# EAGLE board protector4 (EAGLE 8.3.1)
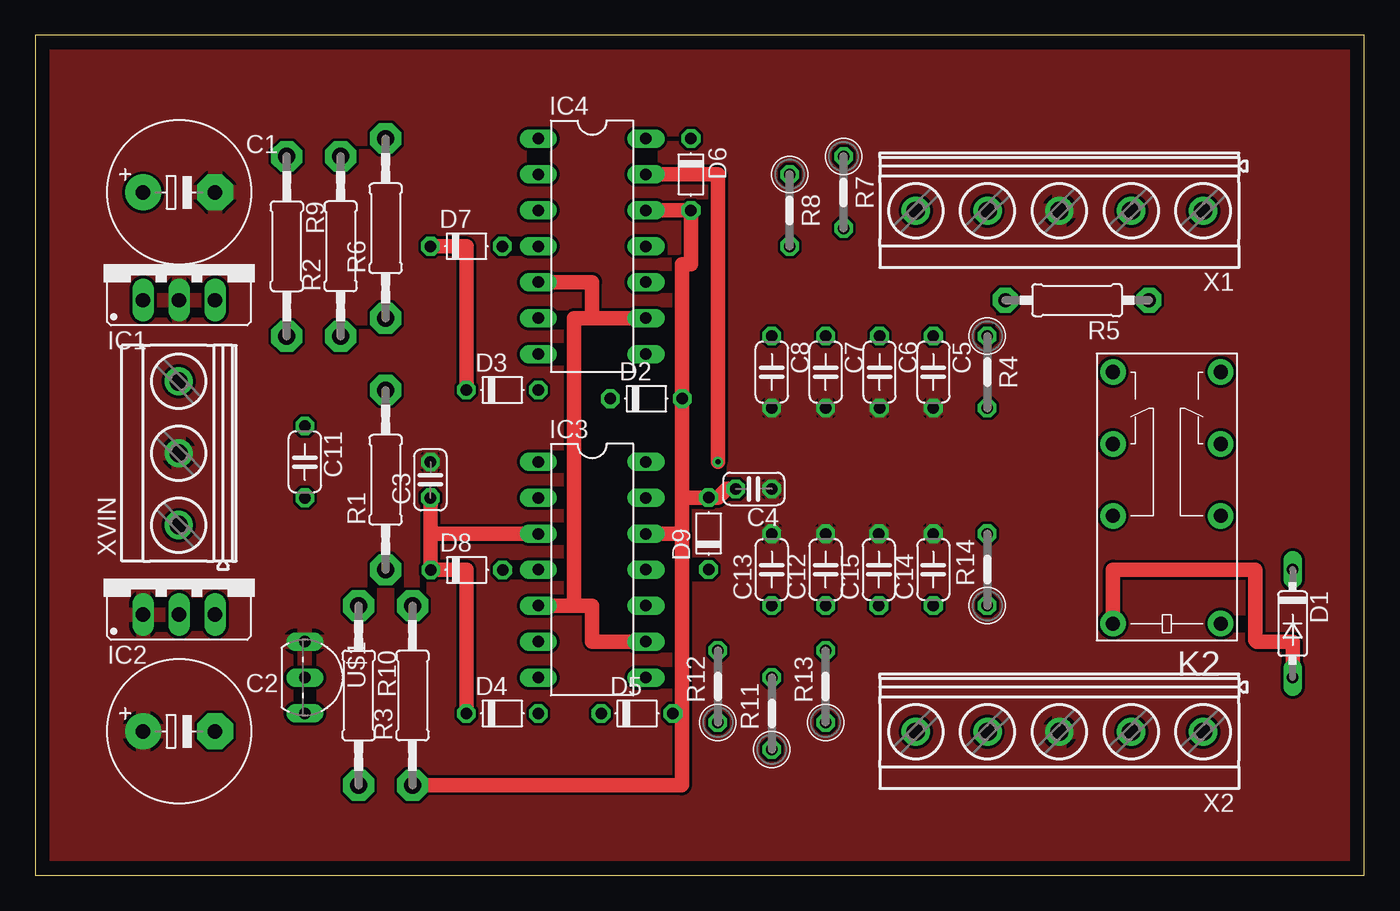
[diagram p0: board, top side]
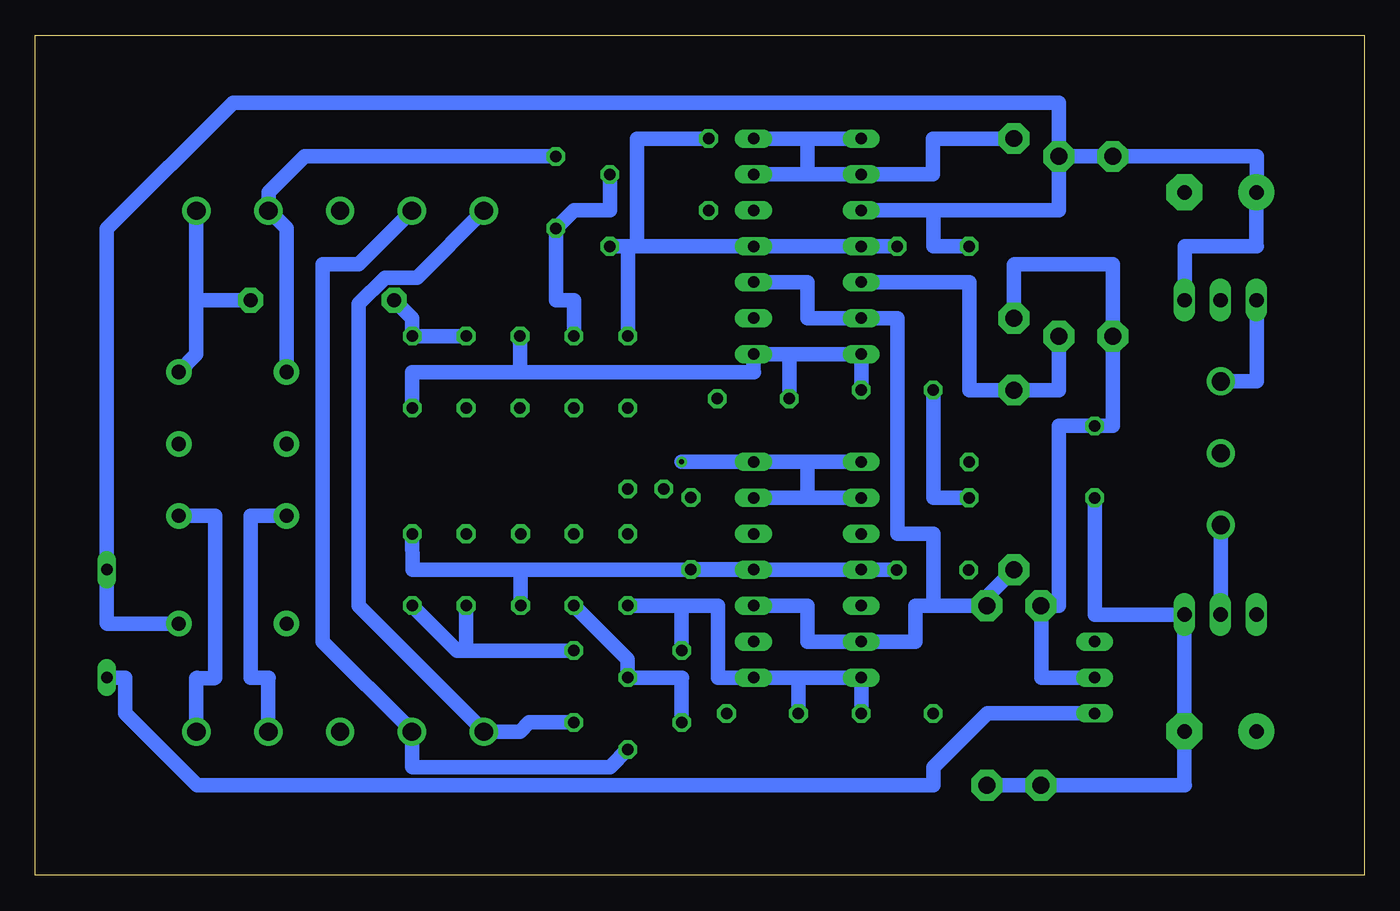
[diagram p1: board, bottom side, seen from below]

Size 93.96 x 59.36 mm. Coordinates in mm from the lower left corner, seen from the top.
Outline: 0,0 93.96,0 93.96,59.36 0,59.36 0,0
Copper layers (1*16): Top 0.035mm / dielectric 1.5mm / Bottom 0.035mm
Design rules "default": minimum track width 10mil, minimum drill 24mil, track to track 8mil, track to pad 8mil, pad to pad 8mil, via to via 8mil, smd to smd 8mil, copper to edge 40mil, drill to drill 8mil, minimum pad ring 10mil, minimum via ring 8mil, stop-mask expansion 4mil, vias tented up to drill 0mil, thermal gap 10mil

## Footprints (pad centres in the part's own frame; a part is rotated, then mirrored left to right if it is on the bottom)
E5-10,5 = drill 1.016 pad 2.54: + -2.54,0 | drill 1.016 pad 2.54 octagon: - 2.54,0
C025-024X044 = drill 0.813 octagon: 1 -1.27,0; 2 1.27,0
C050-024X044 = drill 0.813 octagon: 1 -2.54,0; 2 2.54,0
DO35-7 = drill 0.813 long: A 3.81,0; C -3.81,0
D-5 = drill 0.813 octagon: A 2.54,0; C -2.54,0
78XXS = drill 1.016 long: GND 0,-2.54; IN -2.54,-2.54; OUT 2.54,-2.54
79XXS = drill 1.016 long: GND -2.54,-2.54; IN 0,-2.54; OUT 2.54,-2.54
DIL14 = drill 0.813 long: 1 -7.62,-3.81; 2 -5.08,-3.81; 3 -2.54,-3.81; 4 0,-3.81; 5 2.54,-3.81; 6 5.08,-3.81; 7 7.62,-3.81; 8 7.62,3.81; 9 5.08,3.81; 10 2.54,3.81; 11 0,3.81; 12 -2.54,3.81; 13 -5.08,3.81; 14 -7.62,3.81
G5V-2 = drill 1 pad 1.8: 1 -8.89,-3.81; 4 -1.27,-3.81; 6 3.81,-3.81; 8 8.89,-3.81; 9 8.89,3.81; 11 3.81,3.81; 13 -1.27,3.81; 16 -8.89,3.81
0207/12 = drill 1.2 pad 2.184 octagon: 1 -6.35,0; 2 6.35,0
0207/5V = drill 0.813 octagon: 1 -2.54,0; 2 2.54,0
0207/10 = drill 1 pad 1.778 octagon: 1 -5.08,0; 2 5.08,0
TO92- = drill 0.813 long: 1 -2.54,0; 2 0,0; 3 2.54,0
MKDSN1,5/5-5,08 = drill 1.3 pad 2: 1 -10.181,0.025; 2 -5.101,0.025; 3 -0.021,0.025; 4 5.059,0.025; 5 10.139,0.025
MKDSN1,5/3-5,08 = drill 1.3 pad 2: 1 -7.641,0.025; 2 -2.561,0.025; 3 2.519,0.025

## Placement (x,y rotation side)
C1  [E5-10,5]  10.16,48.26 0 top
C2  [E5-10,5]  10.16,10.16 0 top
C3  [C025-024X044]  27.94,27.94 90 top
C4  [C025-024X044]  50.8,27.3 180 top
C5  [C050-024X044]  63.5,35.56 270 top
C6  [C050-024X044]  59.69,35.56 270 top
C7  [C050-024X044]  55.88,35.56 270 top
C8  [C050-024X044]  52.07,35.56 270 top
C11  [C050-024X044]  19.05,29.21 270 top
C12  [C050-024X044]  55.88,21.59 90 top
C13  [C050-024X044]  52.07,21.59 90 top
C14  [C050-024X044]  63.5,21.59 90 top
C15  [C050-024X044]  59.65,21.59 90 top
D1  1N4148DO35-7  [DO35-7]  88.9,17.78 270 top
D2  [D-5]  43.2,33.68 0 top
D3  [D-5]  33.02,34.29 0 top
D4  [D-5]  33.02,11.43 0 top
D5  [D-5]  42.55,11.43 0 top
D6  [D-5]  46.35,49.53 270 top
D7  [D-5]  30.48,44.45 0 top
D8  [D-5]  30.5,21.57 0 top
D9  [D-5]  47.6,24.15 90 top
IC1  [78XXS]  10.16,43.18 0 top
IC2  [79XXS]  10.16,20.95 0 top
IC3  LM339N  [DIL14]  39.37,21.59 270 top
IC4  LM339N  [DIL14]  39.37,44.45 270 top
K2  G5V-2  [G5V-2]  80.01,26.67 90 top
R1  500  [0207/12]  24.77,27.94 90 top
R2  11K  [0207/12]  21.59,44.45 90 top
R3  11K  [0207/12]  26.67,12.7 90 top
R4  100K  [0207/5V]  67.31,35.56 270 top
R5  100K  [0207/10]  73.66,40.64 180 top
R6  1K  [0207/12]  24.77,45.72 90 top
R7  100K  [0207/5V]  57.15,48.26 270 top
R8  100K  [0207/5V]  53.34,46.99 270 top
R9  100K  [0207/12]  17.78,44.45 270 top
R10  500K  [0207/12]  22.86,12.7 270 top
R11  100K  [0207/5V]  52.07,11.43 90 top
R12  100K  [0207/5V]  48.26,13.34 90 top
R13  100K  [0207/5V]  55.88,13.34 90 top
R14  100K  [0207/5V]  67.31,21.59 90 top
U$1  2N7000  [TO92-]  19.05,13.97 270 top
X1  MKDSN1,5/5-5,08  [MKDSN1,5/5-5,08]  72.39,46.99 180 top
X2  MKDSN1,5/5-5,08  [MKDSN1,5/5-5,08]  72.39,10.16 180 top
XVIN  MKDSN1,5/3-5,08  [MKDSN1,5/3-5,08]  10.16,32.38 90 top

## Library data of the parts
C1-C8 C11-C15 R1-R14 = Vwvwbg
D1-D9 = diode
IC1 IC2 = v-reg
IC3 IC4 = linear
K2 = relay; MPN: G5V-2 5DC; OC_FARNELL: 9949488; OC_NEWARK: 78K5703
U$1 = tranzistory FET
X1 X2 XVIN = con-phoenix-508

## Nets
+12V: C1.+ C3.1 D1.C D3.C D4.C D7.C D8.C IC1.OUT IC3.3 IC4.3 K2.1 R2.2 R9.1
-12V: C2.- C4.2 C11.2 D2.A D5.A D6.A D9.A IC2.OUT IC3.12 IC4.12 R3.1 R10.2
COM+: IC3.5 IC3.9 IC4.5 IC4.9 R1.2 R2.1
COM-: IC3.6 IC3.10 IC4.6 IC4.10 R1.1 R3.2
GND: C1.- C2.+ C3.2 C4.1 C5.2 C6.2 C7.2 C8.2 C12.2 C13.2 C14.2 C15.2 IC1.GND IC2.GND U$1.1 X1.3 X2.3 XVIN.2
LO+: R11.1 X1.4 X2.4
LO-: R13.1 X1.5 X2.5
N$1: IC1.IN XVIN.3
N$2: IC3.1 IC3.2 IC3.13 IC3.14 IC4.1 IC4.2 IC4.13 IC4.14 R6.2
N$3: IC2.IN XVIN.1
N$4: K2.8 R5.1 X1.1
N$5: C7.1 R7.2 R8.1
N$6: C5.1 R4.1 R5.2
N$7: K2.9 R7.1 X1.2
N$10: K2.13 X2.2
N$11: C11.1 R6.1 R9.2 R10.1 U$1.2
N$12: C6.1 D2.C D3.A IC4.7 IC4.8 R4.2
N$13: C8.1 D6.C D7.A IC4.4 IC4.11 R8.2
N$14: D1.A K2.16 U$1.3
N$15: C13.1 D4.A D5.C IC3.7 IC3.8 R12.2
N$16: C15.1 D8.A D9.C IC3.4 IC3.11 R14.2
N$17: K2.4 X2.1
N$19: C12.1 R11.2 R12.1
N$21: C14.1 R13.2 R14.1

## Tracks (layer width: path | path; a pad name or v marks a point on that pad's centre or on a via)
+12V
  Top 1.016: D3.C 30.48,44.45 D7.C | D4.C 30.48,21.59 28.62,21.59 D8.C 27.96,24.11 27.94,24.13 | 27.94,24.13 IC3.3 | 27.94,24.13 C3.1
  Bottom 1.016: K2.1 88.88,17.78 88.9,17.8 D1.C 88.9,45.7 79.99,54.61 21.57,54.61 21.57,50.82 R2.2 | R2.2 R9.1 7.6,50.8 7.6,48.28 C1.+ 7.62,44.47 7.6,44.45 12.68,44.45 12.68,40.66 IC1.OUT | R2.2 21.59,47.01 21.57,46.99 30.46,46.99 | 30.46,46.99 IC4.3 | D7.C 30.46,44.45 30.46,46.99 | C3.1 30.46,26.67 30.46,34.27 D3.C
-12V
  Top 1.016: IC4.12 D6.A 46.35,43.18 45.72,43.18 45.72,33.7 D2.A 45.74,26.67 | 45.74,24.13 45.74,26.67 | 45.74,24.13 45.74,11.43 | D5.A 45.74,11.43 | 45.74,26.67 45.76,26.69 D9.A 47.62,26.67 48.26,26.67 48.9,27.3 C4.2 | IC3.12 45.74,24.13 | 45.74,11.43 45.74,6.39 45.7,6.35 R3.1
  Bottom 1.016: R3.1 R10.2 12.68,6.35 12.7,6.37 C2.- IC2.OUT 19.05,18.41 C11.2
COM+
  Top 1.016: IC4.9 39.37,39.37 | 39.37,39.37 39.37,41.91 IC4.5 | 39.37,39.37 38.1,39.37 38.1,19.05 | 38.1,19.05 IC3.5 | IC3.9 39.37,16.51 39.37,19.05 38.1,19.05
  Bottom 1.016: R2.1 21.59,34.31 21.57,34.29 R1.2 27.92,34.29 27.92,41.91 IC4.5
COM-
  Bottom 1.016: IC4.10 39.35,41.91 39.35,39.37 IC4.6 33,39.37 33,24.13 30.46,24.13 30.46,19.05 | IC3.10 39.35,19.05 39.35,16.51 IC3.6 31.73,16.51 31.73,19.05 30.46,19.05 | 30.46,19.05 R3.2 26.67,19.68 R1.1
GND
  pour Top: 101.58,62.23 -8.91,62.23 -8.91,-3.81 101.58,-3.81
LO+
  Bottom 1.016: X1.4 71.1,43.2 71.1,43.18 73.64,43.18 73.64,16.51 67.33,10.2 X2.4 67.33,7.66 67.29,7.62 53.34,7.62 R11.1
LO-
  Bottom 1.016: X1.5 66.98,42.24 69.24,42.24 71.1,40.38 71.1,19.05 62.25,10.2 X2.5 59.7,10.13 59.03,10.79 R13.1
N$1
  Bottom 1.016: IC1.IN 7.6,40.64 7.6,34.92 10.13,34.92 XVIN.3
N$2  (via drill 0.35)
  Top 1.016: IC4.13 48.26,49.53 v48.26,29.21
  Bottom 1.016: 39.35,52.07 IC4.14 | 39.35,52.07 IC4.1 | IC4.13 39.35,49.53 | IC4.2 39.35,49.53 | IC4.2 35.54,49.53 | 39.35,49.53 39.35,52.07 | 25.38,52.07 R6.2 30.48,52.07 30.48,49.53 IC4.2 | 39.35,26.67 IC3.2 | 39.35,26.67 IC3.13 | 39.35,29.21 IC3.14 v48.26,29.21 | 39.35,29.21 39.35,26.67 | IC3.1 39.35,29.21
N$3
  Bottom 1.016: XVIN.1 10.14,19.05 10.16,19.05 IC2.IN
N$4
  Bottom 1.016: X1.1 82.57,40.64 | R5.1 82.57,40.64 | K2.8 82.57,36.81 82.57,40.64
N$5
  Bottom 1.016: 57.13,45.72 R7.2 | 57.13,45.72 57.13,40.64 55.88,40.64 | 55.86,40.64 55.88,40.64 | 55.88,40.64 C7.1 | R8.1 53.34,47.01 53.32,46.99 55.86,46.99 57.13,45.72
N$6
  Bottom 1.016: R5.2 67.31,39.37 R4.1 C5.1
N$7
  Bottom 1.016: K2.9 76.2,45.7 76.18,45.72 77.42,46.97 X1.2 77.45,47.01 77.45,48.26 74.91,50.8 R7.1
N$10
  Bottom 1.016: X2.2 77.49,13.93 77.45,13.97 78.72,13.97 78.72,25.4 K2.13 76.18,25.4
N$11
  Bottom 1.016: 17.78,43.16 R9.2 17.78,31.77 17.76,31.75 C11.1 21.57,31.75 21.57,19.05 R10.1 22.84,19.03 22.84,13.97 U$1.2 | 17.78,43.16 17.76,43.18 | R6.1 24.77,43.16 24.75,43.18 17.8,43.18 17.78,43.16
N$12
  Bottom 1.016: R4.2 67.31,35.54 67.29,35.56 59.67,35.56 | C6.1 59.69,35.58 59.67,35.56 | 40.62,36.83 IC4.8 43.18,35.56 | 40.62,36.83 IC4.7 | IC4.7 D3.A | D2.C 40.62,33.67 40.62,36.83 | 43.16,35.56 43.18,35.56 | 59.67,35.56 43.18,35.56 | IC4.7 35.54,36.83
N$13
  Bottom 1.016: D7.A IC4.4 IC4.11 51.41,44.45 | 52.05,44.45 R8.2 | 51.41,44.45 52.05,44.45 | C8.1 52.05,38.1 52.05,44.45 | 51.41,44.45 51.41,52.07 D6.C
N$14
  Top 1.016: K2.16 76.2,21.59 86.26,21.59 86.26,16.61 86.36,16.51 88.9,16.51 D1.A
  Bottom 1.016: U$1.3 26.65,11.43 30.46,7.62 30.46,6.35 82.53,6.35 87.61,11.43 87.61,13.97 D1.A
N$15
  Bottom 1.016: 39.35,13.97 IC3.8 45.7,13.97 45.7,19.05 48.24,19.05 | 39.35,13.97 IC3.7 D4.A | 48.24,19.05 C13.1 | R12.2 48.26,19.03 48.24,19.05 | D5.C 40.01,13.95 39.35,13.97
N$16
  Bottom 1.016: R14.2 67.31,24.15 67.29,21.59 59.67,21.59 | C15.1 59.65,21.57 59.67,21.59 | IC3.11 59.67,21.59 | D8.A 35.54,21.57 IC3.4 IC3.11 | D9.C 43.2,21.61 IC3.11
N$17
  Bottom 1.016: X2.1 82.57,13.93 | 82.57,13.93 82.53,13.97 | 82.57,13.93 81.3,13.93 81.26,13.97 81.26,25.4 K2.4
N$19
  Bottom 1.016: R12.1 48.26,13.95 48.24,13.97 R11.2 52.07,15.26 54.59,17.78 54.61,17.78 C12.1
N$21
  Bottom 1.016: 63.48,15.88 R13.2 | 63.48,15.88 64.14,15.88 R14.1 | C14.1 63.5,15.89 63.48,15.88